# Altium PCB ParallelJoysticks.PcbDoc
Units mm, origin at the board's own origin, x right, y up, seen from the top; angles counter-clockwise.
Board outline 30.3 x 62.5 mm, 4 copper layers (Top Layer, Ground, Signal Middle, Bottom Layer), stack 1.741 mm thick; 10 components, 29 nets, 107 pads, 42 vias.
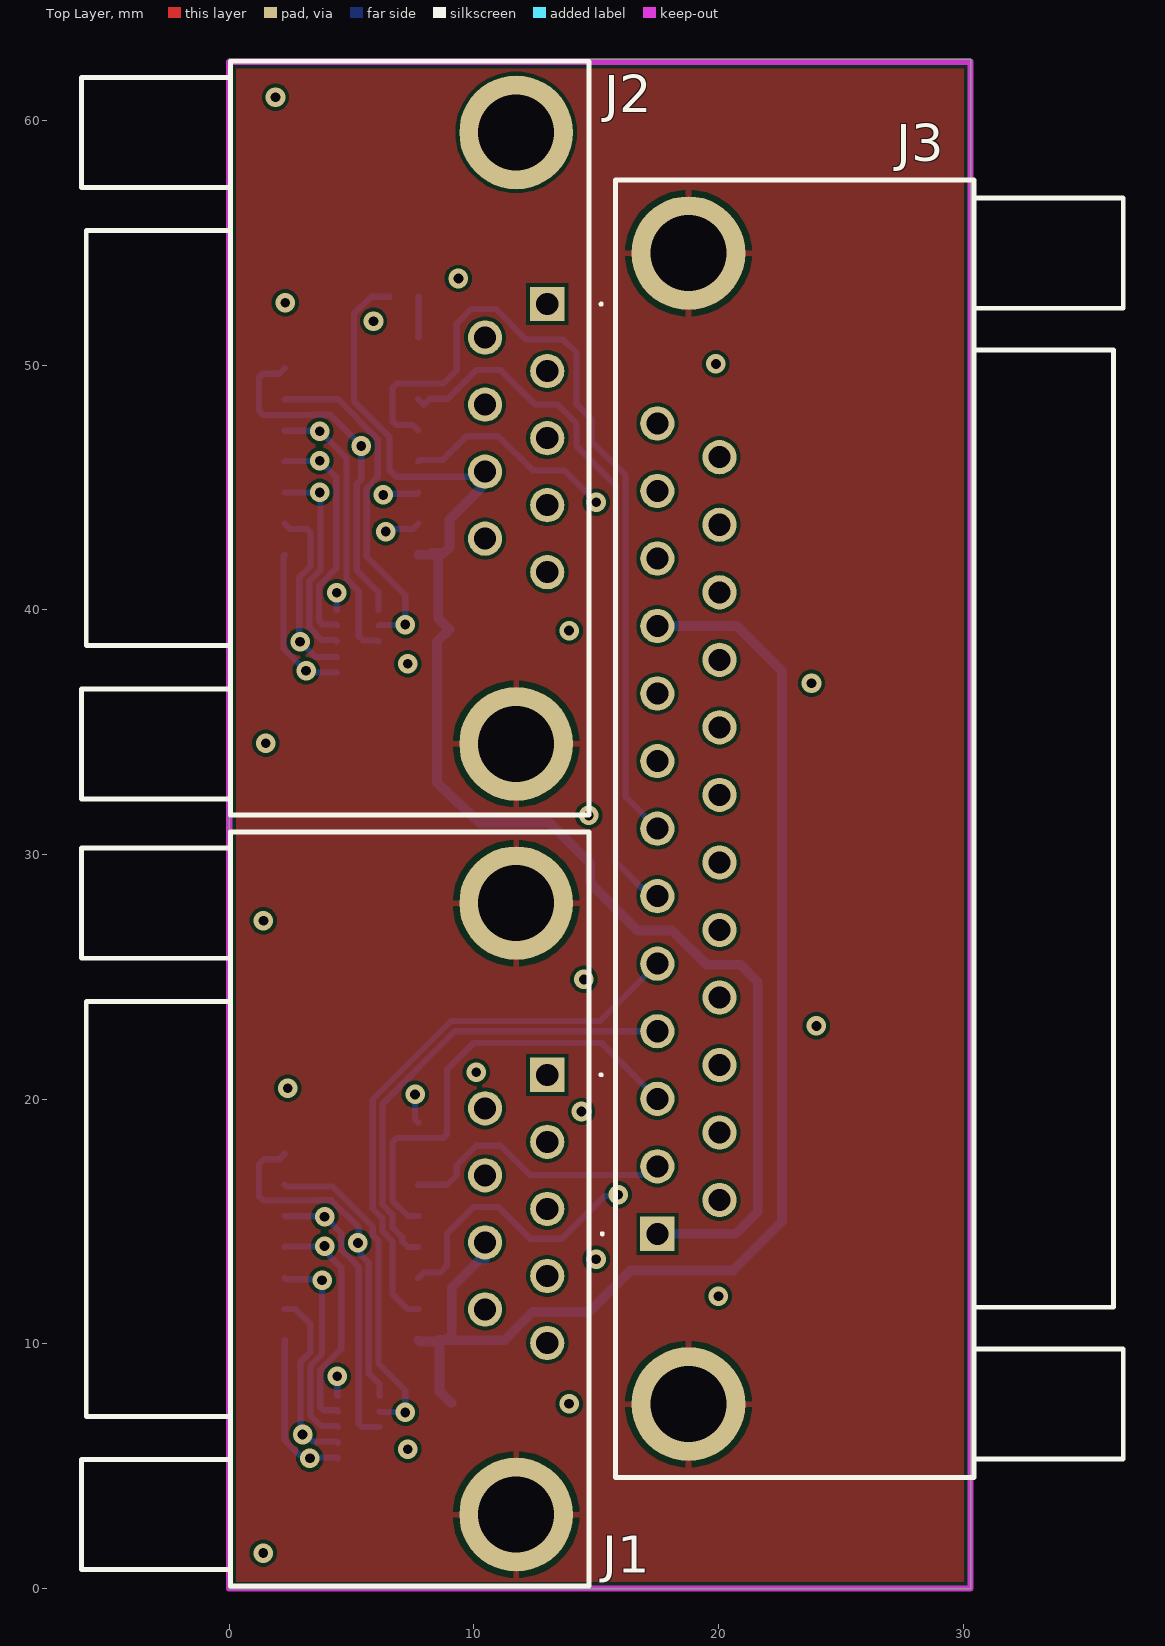
[diagram p0: Top Layer view]
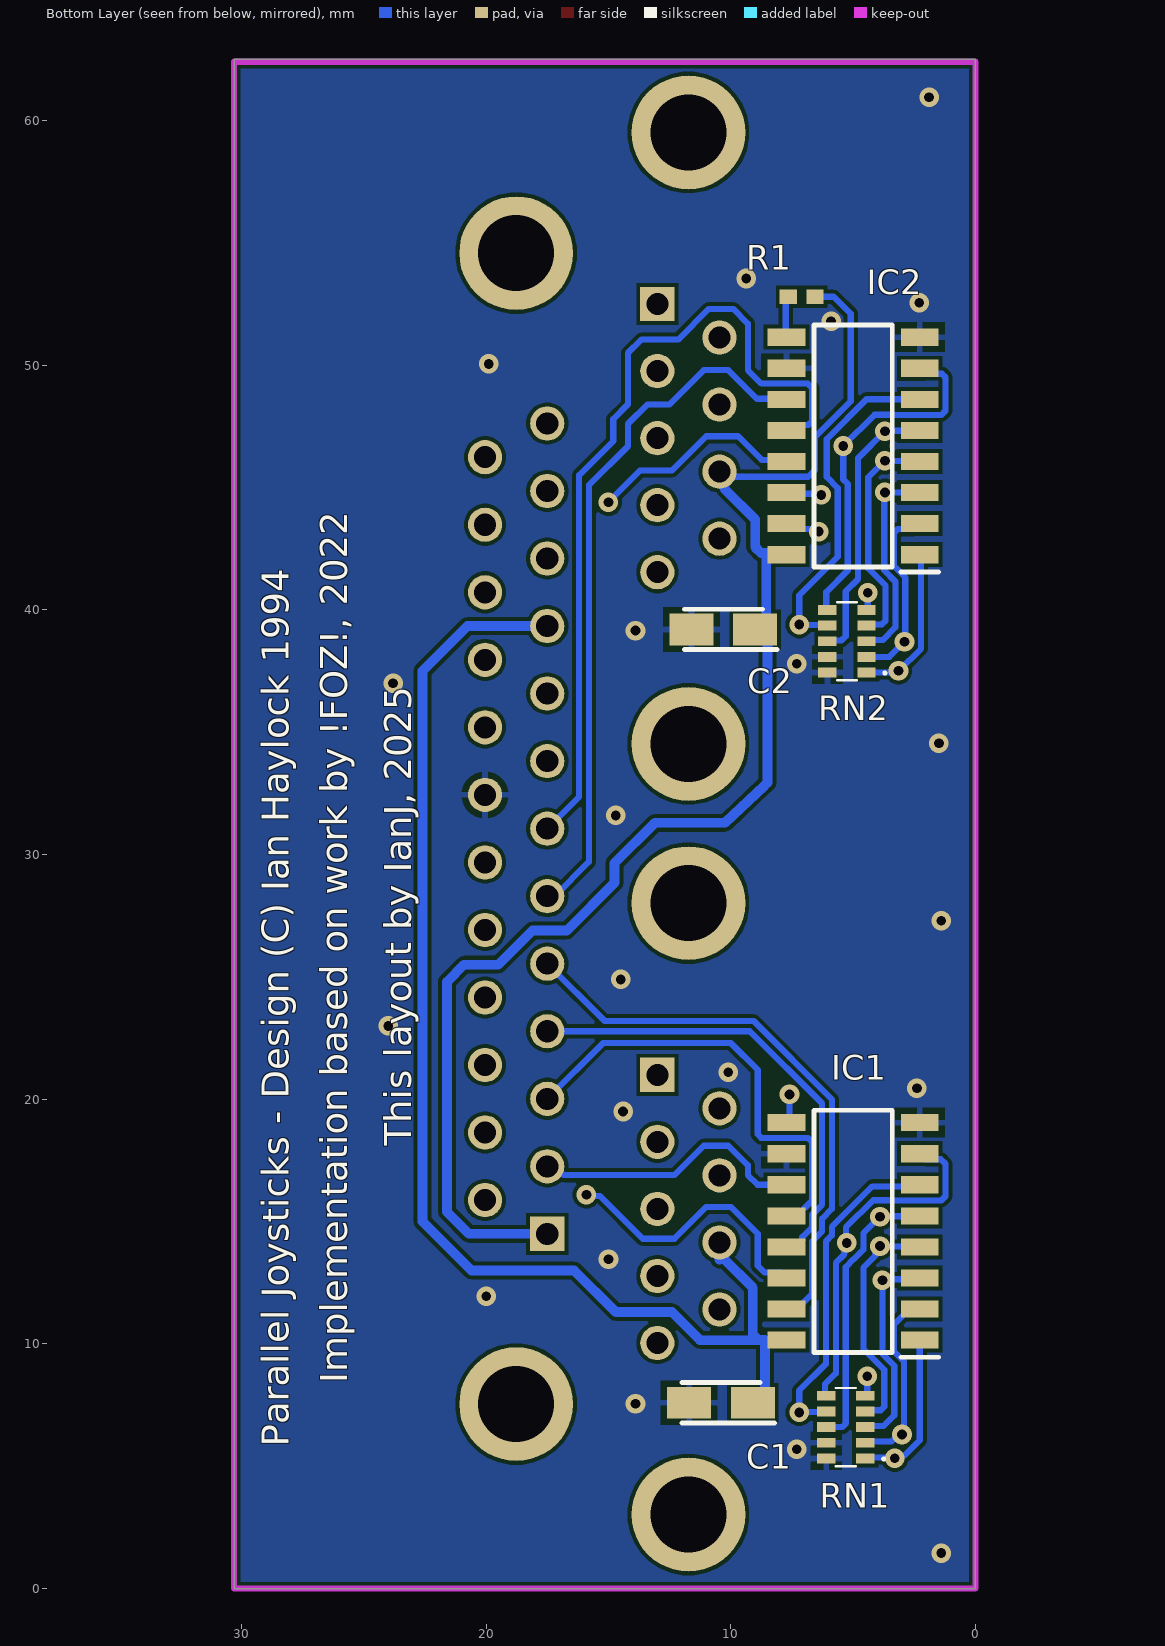
[diagram p1: Bottom Layer view, seen from below]
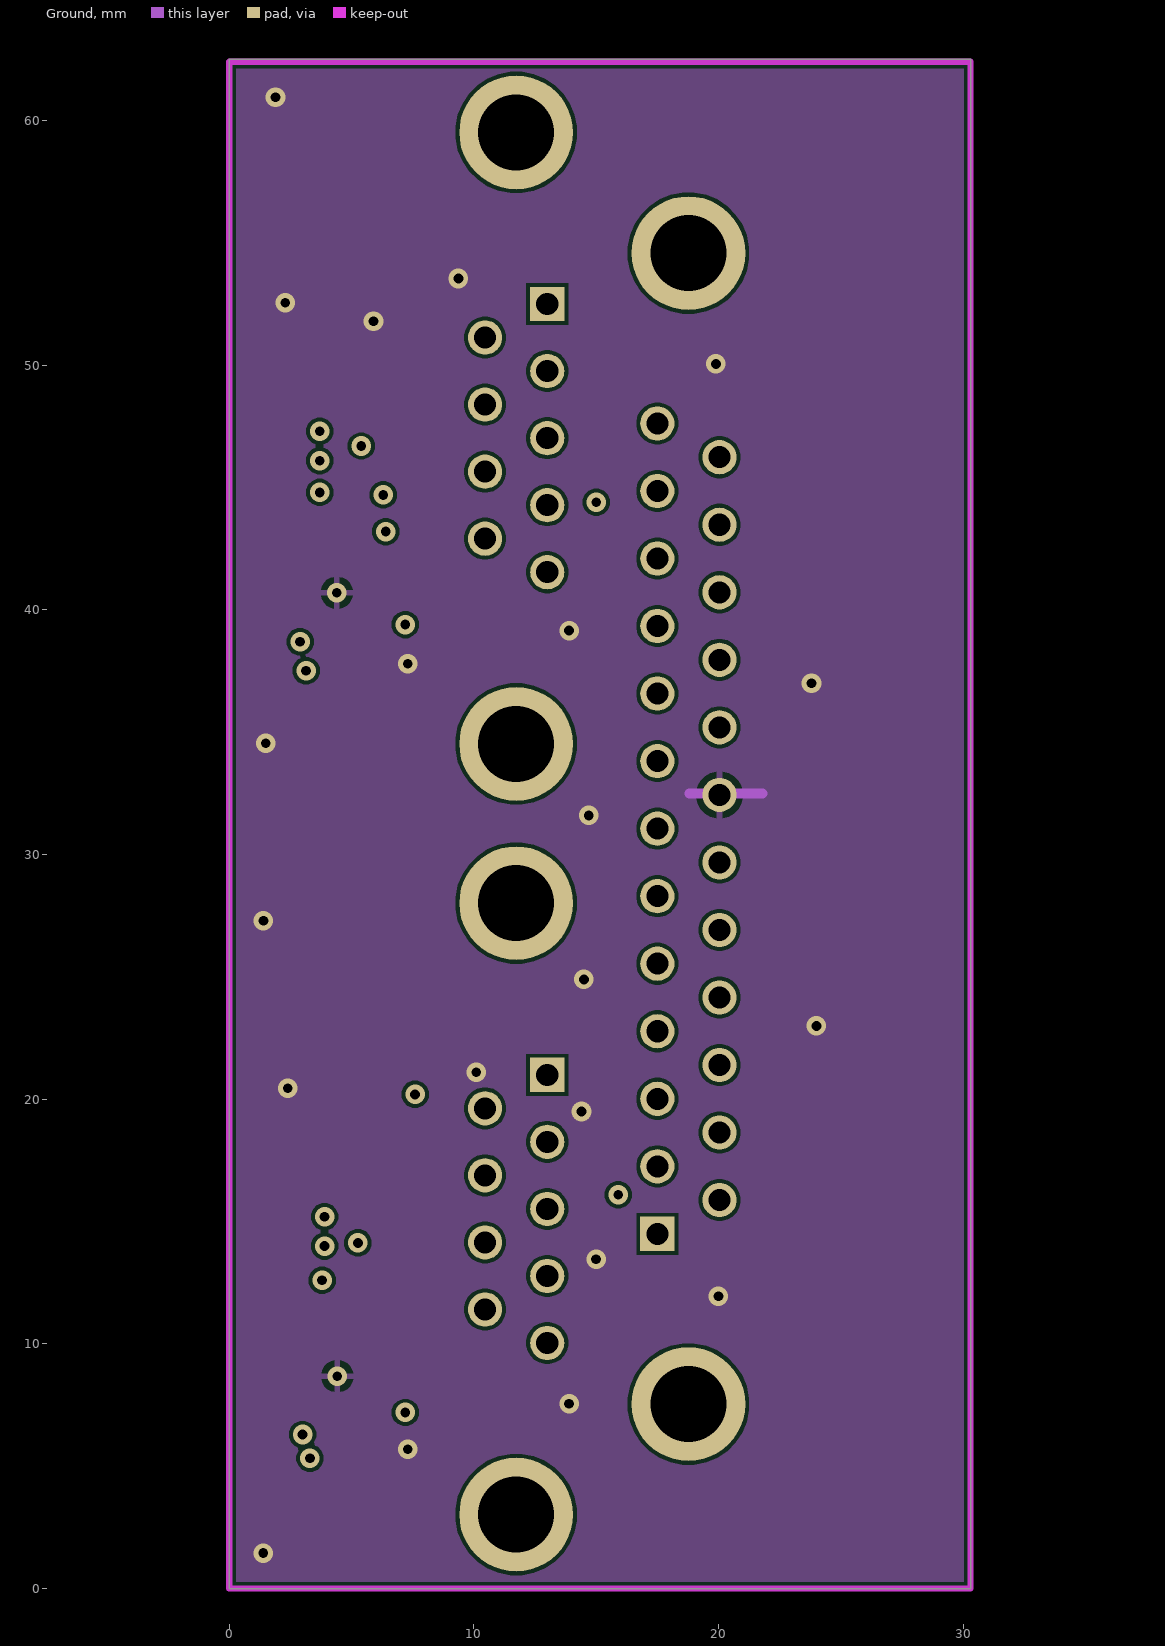
[diagram p2: Ground]
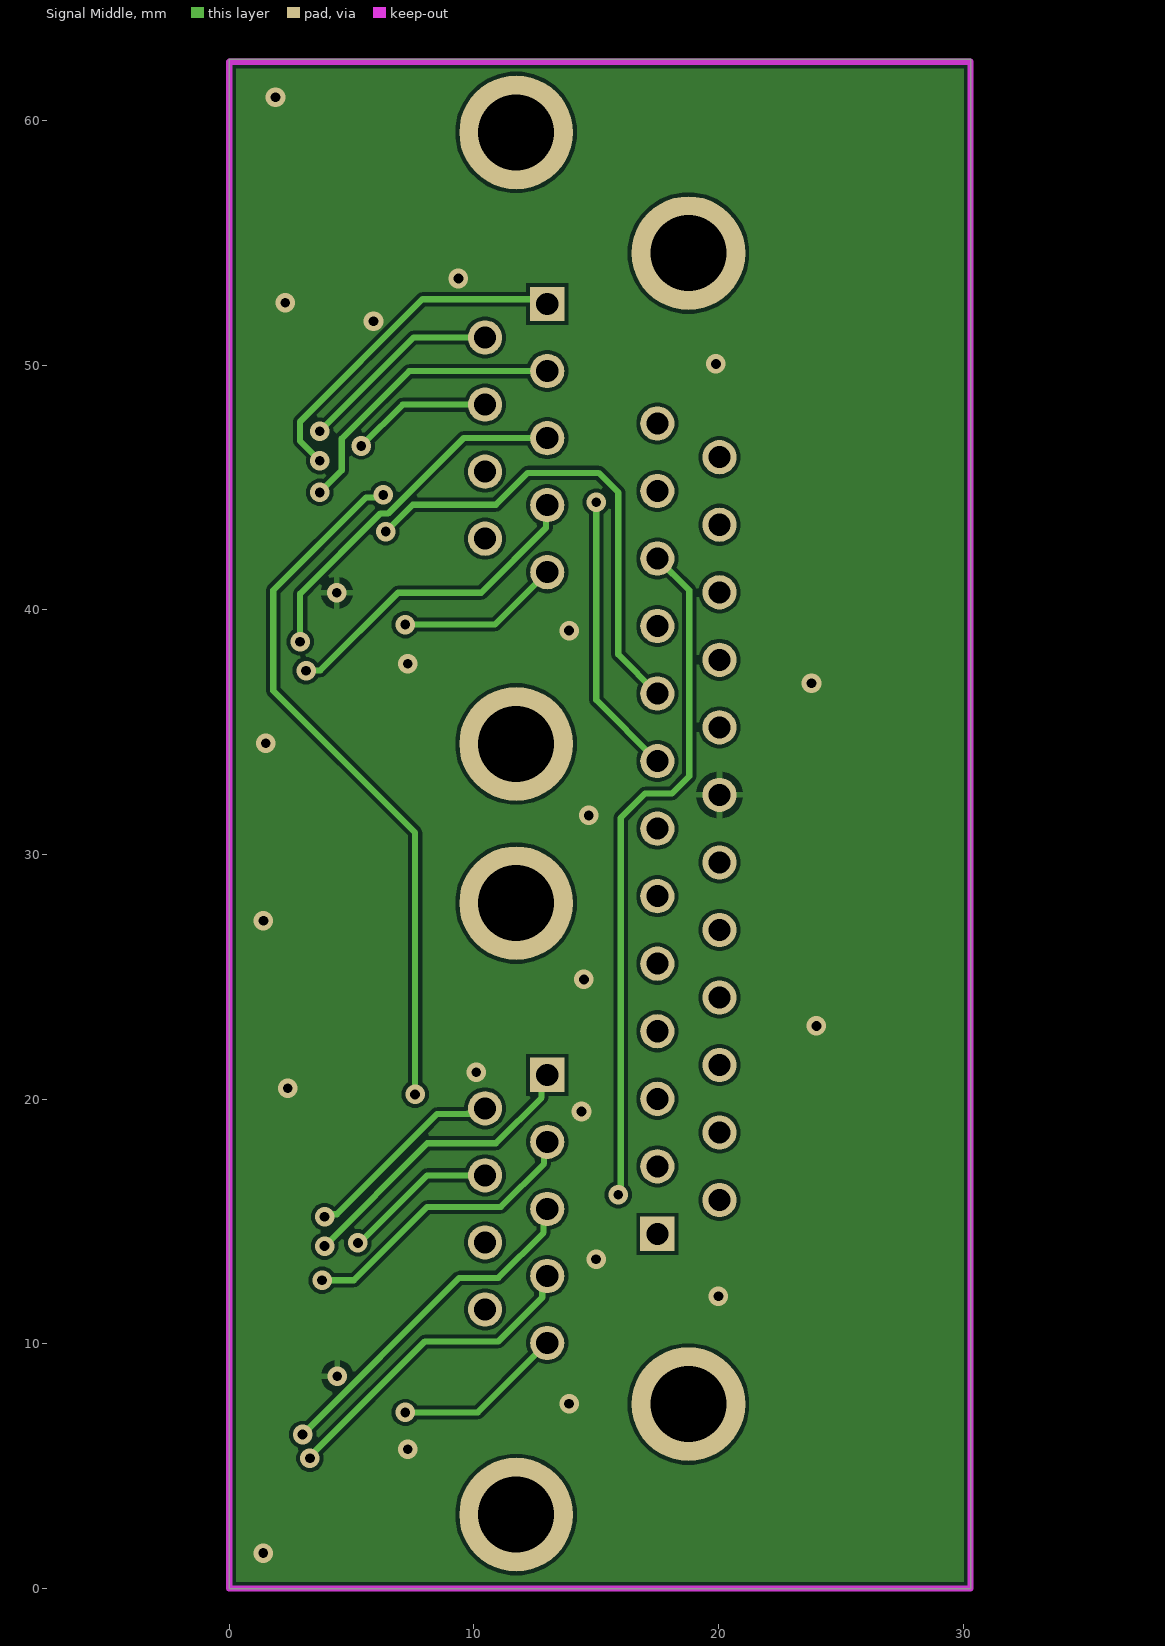
[diagram p3: Signal Middle]
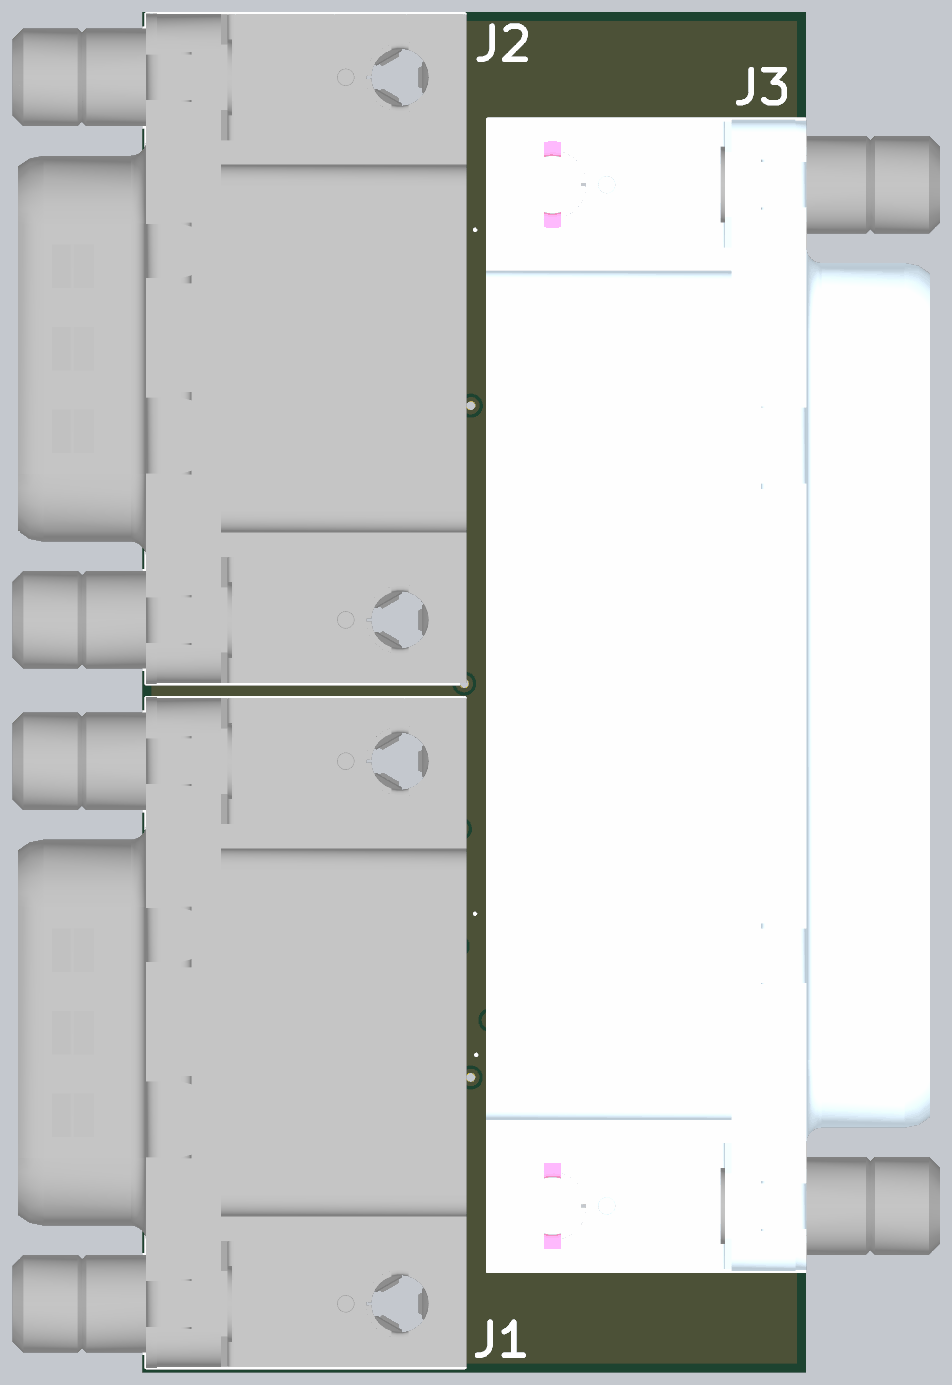
[diagram p4: 3D render of the assembled board from above, using the file's embedded part models]
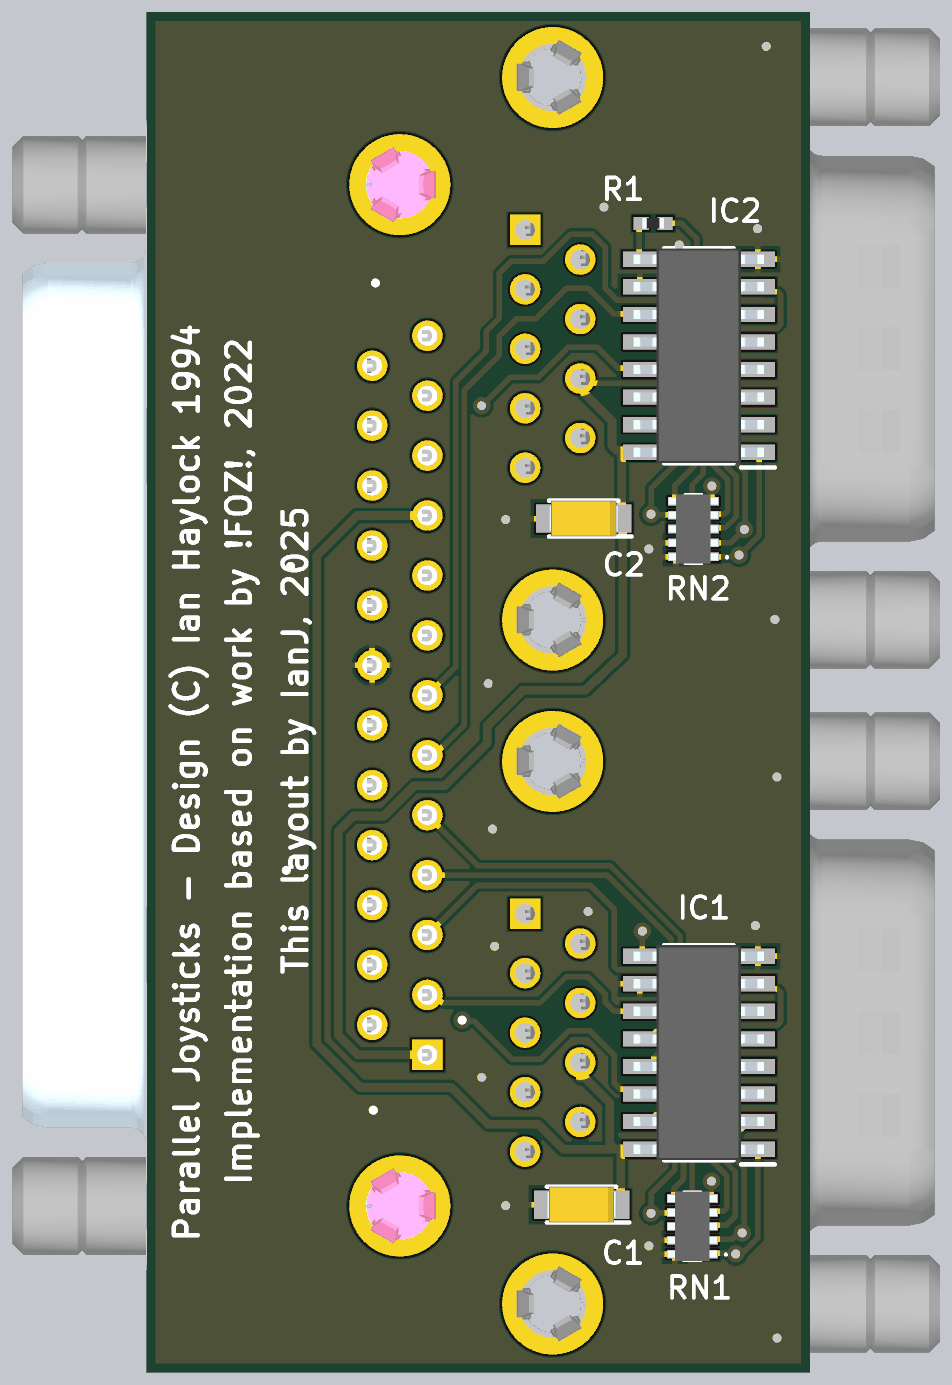
[diagram p5: 3D render of the assembled board from below, using the file's embedded part models]

## Layer stack, top to bottom
Top Solder: solder mask 0.0102, Solder Resist, Dk 3.5
Top Layer: signal copper 0.0356
Dielectric 1: dielectric 0.2, FR-4, Dk 4.8
Ground: signal copper 0.035
Dielectric 2: core 1.2, PP-006, Dk 4.1
Signal Middle: signal copper 0.035
Dielectric2: dielectric 0.2, FR-4, Dk 4.8
Bottom Layer: signal copper 0.0356
Bottom Solder: solder mask 0.0102, Solder Resist, Dk 3.5

## Board outline
0,0 0,62.5 30.3,62.5 30.3,0

## Design rules (kind name [scope] priority, off if disabled: settings)
Clearance [All] p1: gap=0.15 ignorepadtopadclearanceinfootprint=FALSE
HoleSize [All] p1: absolutevalues=TRUE maxlimit=5 minlimit=0.025 maxpercent=80.000 minpercent=20.000
MinimumSolderMaskSliver [All] p1: minsoldermaskwidth=0.05
PolygonConnect [All] p1: connectstyle=Relief reliefconductorwidth=0.254 reliefentries=4 polygonreliefangle="90 Angle" airgapwidth=0.254
RoutingVias [All] p1: holewidth=0.711 width=1.27 viastyle="Through Hole" minholewidth=0.711 minwidth=1.27 maxholewidth=0.711 maxwidth=1.27
SilkToSolderMaskClearance [IsPad] p1 off: minsilkscreentomaskgap=0.254 clearancetoexposedcopper=TRUE
SolderMaskExpansion [All] p1: expansion=0.102 istentingtop=FALSE
SupplyNets "Schematic Supply Nets_4" [InNet('VCCB')] p1: voltage=0.000
SupplyNets "Schematic Supply Nets_3" [InNet('VCCA')] p2: voltage=0.000
SupplyNets "Schematic Supply Nets_2" [InNet('SHLD')] p3: voltage=0.000
SupplyNets "Schematic Supply Nets" [InNet('GND')] p4: voltage=0.000
Width [All] p1: maxlimit=0.5 minlimit=0.254 preferedwidth=0.254 minimp=50.000000 maximp=50.000000 favimp=50.000000
27 further rules are at their usual default settings.

## Components (designator, comment, footprint, x,y, rotation, side; value= is the part's Value field where it differs from the comment)
C1 "10uF_1206" CAPPM3216X180N 10.4,7.6 r0 bottom
C2 "10uF_1206" CAPPM3216X180N 10.3,39.2 r0 bottom
IC1 "MC14512BDR2G" SOIC127P600X175-16N 5,14.6 r0 bottom locked
IC2 "MC14512BDR2G" SOIC127P600X175-16N 5,46.7 r0 bottom locked
J1 "D09P13A4GL00LF" D09P13A4GV00LF 13,21 r270 top locked
J2 "D09P13A4GL00LF" D09P13A4GV00LF 13,52.5 r270 top locked
J3 "D25P13A4GL00LF" D25P13A4GV00LF 17.5,14.5 r90 top locked
R1 "100K_0402" RESC1005X40N 7.1,52.8 r180 bottom
RN1 "YC158TJR-07100KL" YC158TJR07100KL 5.3,6.6 r0 bottom locked
RN2 "YC158TJR-07100KL" YC158TJR07100KL 5.25,38.72 r0 bottom locked

## Footprints (in the part's own frame and the unit in brackets; to place one, negate y for a bottom-side part, rotate by r counter-clockwise, add the part's x,y. Pads: shape width x height; smd on the part's side, far side on the other; paste and mask are expansions set on the pad)
CAPPM3216X180N [mm]
  rect 1.8x1.3 smd: 1(-1.3,0) 2(1.3,0)
  silkscreen extent -2.2,-0.82 1.6,0.82, body extent -1.6,-0.82 1.6,0.82, height 1.8
D09P13A4GV00LF [mm]
  rect 1.4x1.4 hole 0.9: 1(0,0)
  round 1.4 hole 0.9: 2(2.74,0) 3(5.48,0) 4(8.22,0) 5(10.96,0) 6(1.37,-2.54) 7(4.11,-2.54) 8(6.85,-2.54) 9(9.59,-2.54)
  round 4.65 hole 3.1: 10(-7.015,-1.27) 11(17.975,-1.27)
  silkscreen extent -9.92,-19.04 20.89,2.25, body extent -9.98,-19.11 20.93,1.79, height 13.43
D25P13A4GV00LF [mm]
  rect 1.4x1.4 hole 0.9: 1(0,0)
  round 1.4 hole 0.9: 2(2.76,0) 3(5.52,0) 4(8.28,0) 5(11.04,0) 6(13.8,0) 7(16.56,0) 8(19.32,0) 9(22.08,0) 10(24.84,0) 11(27.6,0) 12(30.36,0) 13(33.12,0) 14(1.38,-2.54) 15(4.14,-2.54) 16(6.9,-2.54) 17(9.66,-2.54) 18(12.42,-2.54) 19(15.18,-2.54) 20(17.94,-2.54) 21(20.7,-2.54) 22(23.46,-2.54) 23(26.22,-2.54) 24(28.98,-2.54) 25(31.74,-2.54)
  round 4.65 hole 3.1: 26(-6.96,-1.27) 27(40.08,-1.27)
  silkscreen extent -9.95,-19.04 43.07,2.3, body extent -9.96,-19.11 43.08,1.79, height 13.32
RESC1005X40N [mm]
  rect 0.7x0.6 smd: 1(-0.55,0) 2(0.55,0)
  body extent -0.5,-0.25 0.5,0.25, height 0.4
SOIC127P600X175-16N [mm]
  rect 1.55x0.7 smd: 1(-2.725,4.445) 2(-2.725,3.175) 3(-2.725,1.905) 4(-2.725,0.635) 5(-2.725,-0.635) 6(-2.725,-1.905) 7(-2.725,-3.175) 8(-2.725,-4.445) 9(2.725,-4.445) 10(2.725,-3.175) 11(2.725,-1.905) 12(2.725,-0.635) 13(2.725,0.635) 14(2.725,1.905) 15(2.725,3.175) 16(2.725,4.445)
  silkscreen extent -3.5,-4.95 1.6,5.15, body extent -3,-4.95 3,4.95, height 1.75
YC158TJR07100KL [mm]
  rect 0.75x0.4 smd: 1(-0.8,1.28) 2(-0.8,0.64) 3(-0.8,0) 4(-0.8,-0.64) 5(-0.8,-1.28) 6(0.8,1.28) 7(0.8,0.64) 8(0.8,0) 9(0.8,-0.64) 10(0.8,-1.28)
  silkscreen extent -1.6,-1.6 0.4,1.6, body extent -1.13,-1.6 1.13,1.6, height 0.8

## Part data
C1 C2: library part TAJA106M010RNJ, "Capacitor Polarised", Manufacturer_Name="Kyocera AVX", Mouser Part Number=581-TAJA106M010R, Arrow Part Number=TAJA106M010RNJ, Arrow Price/Stock=https://www.arrow.com/en/products/taja106m010rnj/avx?utm_currency=USD&region=nac, Datasheet Link=http://www.farnell.com/datasheets/1680476.pdf, Height=1.8mm, Manufacturer_Part_Number=TAJA106M010RNJ, Mouser Price/Stock=https://www.mouser.co.uk/ProductDetail/KYOCERA-AVX/TAJA106M010RNJ?qs=OVpPYgiJXXXkHCh9%252BEALWw%3D%3D
IC1 IC2: "Integrated Circuit", Manufacturer_Name=onsemi, Mouser Part Number=863-MC14512BDR2G, Arrow Part Number=MC14512BDR2G, Arrow Price/Stock=https://www.arrow.com/en/products/mc14512bdr2g/on-semiconductor, Datasheet Link=https://www.onsemi.com/pub/Collateral/MC14512B-D.PDF, Height=1.75mm, Manufacturer_Part_Number=MC14512BDR2G, Mouser Price/Stock=https://www.mouser.co.uk/ProductDetail/onsemi/MC14512BDR2G?qs=g2rIOKKlpoaxQ58M9hSKIg%3D%3D
J1 J2: library part D09P13A4GV00LF, "Connector", Manufacturer_Name="Amphenol Communications Solutions", Datasheet Link=https://cdn.amphenol-cs.com/media/wysiwyg/files/drawing/c01-8646-0742.pdf, Height=13.86mm, Manufacturer_Part_Number=D09P13A4GL00LF
J3: library part D25P13A4GV00LF, "Connector", Manufacturer_Name="Amphenol Communications Solutions", Datasheet Link=https://cdn.amphenol-cs.com/media/wysiwyg/files/drawing/c01-8646-0742.pdf, Height=13.86mm, Manufacturer_Part_Number=D25P13A4GL00LF
R1: library part CRCW0402100KFKEDHP, "Resistor", Manufacturer_Name=Vishay, Mouser Part Number=71-CRCW0402100KFKEDH, Arrow Part Number=CRCW0402100KFKEDHP, Arrow Price/Stock=https://www.arrow.com/en/products/crcw0402100kfkedhp/vishay?utm_currency=USD&region=nac, Datasheet Link=http://www.vishay.com/docs/20035/dcrcwe3.pdf, Height=0.4mm, Manufacturer_Part_Number=CRCW0402100KFKEDHP, Mouser Price/Stock=https://www.mouser.co.uk/ProductDetail/Vishay-Dale/CRCW0402100KFKEDHP?qs=k2%2FDWSARqgGFakjlJe4Ejw%3D%3D
RN1 RN2: "Resistor Network", Manufacturer_Name=KEMET, Mouser Part Number=603-YC158TJR-07100KL, Arrow Part Number=YC158TJR-07100KL, Arrow Price/Stock=https://www.arrow.com/en/products/yc158tjr-07100kl/yageo?region=nac, Datasheet Link=https://media.digikey.com/pdf/Data%20Sheets/Yageo%20PDFs/YC102-358,TC122-164_Series_DS.pdf, Height=0.7mm, Manufacturer_Part_Number=YC158TJR-07100KL, Mouser Price/Stock=https://www.mouser.com/Search/Refine.aspx?Keyword=603-YC158TJR-07100KL

## Via types
v1: diameter 0.8, hole 0.4, Top Layer to Bottom Layer, tented both sides, 42 vias

## Nets (pads, with @x,y where several pads share a name; then routed paths per layer and width w, separated by ;. In a path a pad name is that pad's centre, name@x,y a point inside that pad or via, vN(x,y) a via of type N, cw(c..) or ccw(c..) an arc to the next point about the centre after c; other vN are vias at no path point)
A_1: IC1.11 J3.2 | length 11.3
  Bottom Layer w0.254: IC1.11 8.905,16.505 9.3,16.9 9.3,17.3 10.1,18.1 11.1,18.1 12.3,16.9 16.83,16.9 17.19,17.26 J3.2
A_2: IC2.11 J3.6 | length 28.9
  Bottom Layer w0.254: IC2.11 7.948,48.382 8.198,48.632 8.932,48.632 10.1,49.8 11.1,49.8 12.5,48.4 13.4,48.4 14.2,47.6 14.2,46.696 15.796,45.1 15.796,29.704 17.2,28.3 J3.6
B_1: IC1.12 J3.3 | length 18.7
  Bottom Layer w0.254: IC1.12 7.3,15.235 6.673,15.862 6.673,18.24 6.851,18.418 8.751,18.418 8.9,18.567 8.9,21.2 10,22.3 15.22,22.3 J3.3
B_2: IC2.12 J3.7 | length 34.1
  Bottom Layer w0.254: IC2.12 7.502,47.558 6.822,47.558 6.673,47.707 6.673,49.07 6.851,49.248 8.748,49.248 9.3,49.8 9.3,51.7 9.9,52.3 10.9,52.3 12.15,51.05 13.651,51.05 14.2,50.501 14.2,48.4 14.8,47.8 14.8,46.9 16.2,45.5 16.2,32.36 J3.7
C_1: IC1.13 J3.4 | length 19.2
  Bottom Layer w0.254: IC1.13 7.3,13.965 7.077,14.188 7.077,14.366 6.673,14.77 6.673,15.291 6.269,15.695 6.269,19.826 9.223,22.78 J3.4
C_2: IC2.13 J3.8 | length 20.4
  Signal Middle w0.254: v1(15,44.4) 15,36.32 J3.8
  Bottom Layer w0.254: IC2.13 7.792,46.132 8.732,46.132 9.7,47.1 11,47.1 12.4,45.7 13.7,45.7 v1(15,44.4)
DIS_1: IC1.15 J3.5 | length 23.5
  Bottom Layer w0.254: IC1.15 7.3,11.425 6.673,12.052 6.673,14.199 6.269,14.603 6.269,15.123 5.865,15.527 5.865,19.994 9.071,23.2 15.16,23.2 J3.5
DIS_2: IC2.15 J3.9 | length 21.2
  Signal Middle w0.254: v1(6.4,43.2) 7.5,44.3 10.9,44.3 12.2,45.6 15.1,45.6 15.9,44.8 15.9,38.18 J3.9
  Bottom Layer w0.254: v1(6.4,43.2) 6.504,43.304 7.504,43.304 IC2.15
GND: C1.2 C2.2 IC1.8 IC1.10 IC2.8 IC2.10 J3.20 RN1.5 RN1.6 RN1.7 RN2.5 RN2.6 RN2.7 | length 4.5
  Ground w0.4: 18.8,32.5 21.8,32.5
  Bottom Layer w0.254: RN2.5@4.4,40 v1(4.4,40.7) ; v1(4.418,8.682) 4.418,7.912 RN1.5@4.45,7.88
  other v1: 1.394,1.453 7.3,5.7 13.894,7.553 19.994,11.953 14.997,13.459 14.4,19.5 2.394,20.453 10.1,21.1 24,23 14.5,24.9 1.4,27.3 14.7,31.6 1.494,34.553 23.8,37 7.3,37.8 13.894,39.153 19.894,50.053 5.9,51.8 2.294,52.553 9.368,53.543 1.894,60.953
NetIC2_9: IC2.9 R1.1 | length 1.7
  Bottom Layer w0.254: IC2.9 7.75,51.17 R1.1@7.75,52.8
SHLD: J1.10 J1.11 J2.11 J3.26 J3.27
VCCA: C1.1 IC1.16 J1.8 J3.10 | length 53.2
  Bottom Layer w0.4: IC1.16 7.78,10.1 8.6,10.1 8.6,8.05 9.05,7.6 C1.1 ; 8.6,10.176 8.866,10.176 ; 10.269,13.469 9.1,12.3 9.1,10.389 8.866,10.155 11.255,10.155 12.4,11.3 14.7,11.3 16.4,13 20.6,13 22.6,15 22.6,37.5 20.76,39.34 J3.10 ; J1.8@10.269,13.64 10.269,13.959 J1.8 10.46,13.959 10.46,13.64 10.46,13.44
VCCB: C2.1 IC2.16 J2.8 J3.1 R1.2 | length 58.4
  Bottom Layer w0.254: R1.2 5.8,52.8 5.1,52.1 5.1,48.529 6.552,47.077 6.552,45.721 6.835,45.438 J2.8@10.248,45.438
  Bottom Layer w0.4: IC2.16 IC2.16@8.3,42.255 ; IC2.16@8.3,42.327 8.766,42.327 9,42.561 9,43.7 10.269,44.969 10.269,45.459 J2.8 J2.8@10.248,45.438 ; 8.545,42.255 8.545,39.65 8.995,39.2 C2.1 8.5,38.7 8.5,32.939 8.621,32.818 10.23,31.3 12.3,31.3 13.1,31.3 14.75,29.65 14.75,28.85 16.7,26.9 18.1,26.9 19.5,25.5 20.9,25.5 21.6,24.8 21.6,15.4 20.7,14.5 J3.1
X0_1: IC1.1 J1.4 RN1.1 | length 19.8
  Signal Middle w0.254: v1(3.3,5.331) 3.3,5.4 8,10.1 11,10.1 12.799,11.899 12.799,12.579 J1.4
  Bottom Layer w0.254: IC1.1 2.275,6.068 2.907,5.435 3.196,5.435 v1(3.3,5.331) ; v1@3.34,5.36 4.41,5.36 RN1.1@4.45,5.32
X0_2: IC2.1 J2.4 RN2.1 | length 19.6
  Signal Middle w0.254: v1(3.144,37.517) 3.157,37.529 3.729,37.529 6.9,40.7 10.3,40.7 12.948,43.348 12.948,44.228 J2.4
  Bottom Layer w0.254: IC2.1 2.223,42.203 2.223,38.42 3.126,37.517 v1(3.144,37.517) ; v1@3.2,37.6 3.348,37.6 3.508,37.44 RN2.1@4.4,37.44
X1_1: IC1.2 J1.3 RN1.2 | length 21.9
  Signal Middle w0.254: v1(3,6.3) 9.4,12.7 11,12.7 12.85,14.55 12.85,15.37 J1.3
  Bottom Layer w0.254: IC1.2 2.7,11.425 3.327,10.798 3.327,9.69 2.915,9.278 2.915,6.385 v1(3,6.3) 3.148,6.3 3.44,6.008 4.402,6.008 RN1.2@4.45,5.96
X1_2: IC2.2 J2.3 RN2.2 | length 22.3
  Signal Middle w0.254: v1(2.9,38.7) 2.9,40.657 6.183,43.94 6.498,43.94 9.577,47.02 J2.3
  Bottom Layer w0.254: IC2.2 2.498,43.302 3.178,43.302 3.327,43.153 3.327,41.79 2.865,41.328 2.865,38.735 3.52,38.08 RN2.2@4.4,38.08
X2_1: IC1.3 J1.2 RN1.3 | length 20.6
  Signal Middle w0.254: v1(3.8,12.6) 5.1,12.6 8.1,15.6 11.1,15.6 12.87,17.37 12.87,18.13 J1.2
  Bottom Layer w0.254: IC1.3 2.322,12.648 3.752,12.648 v1(3.8,12.6) 3.8,9.592 3.319,9.111 3.319,7.081 3.752,6.648 4.402,6.648 RN1.3@4.45,6.6
X2_2: IC2.3 J2.2 RN2.3 | length 20.6
  Signal Middle w0.254: v1(3.7,44.8) 4.6,45.7 4.6,47 7.36,49.76 J2.2
  Bottom Layer w0.254: IC2.3 2.277,44.797 3.698,44.797 v1(3.7,44.8) 3.731,44.769 3.731,41.623 3.269,41.161 3.269,39.288 3.789,38.768 4.352,38.768 RN2.3@4.4,38.72
X3_1: IC1.4 J1.1 RN1.4 | length 22
  Signal Middle w0.254: v1(3.9,14) 8.1,18.2 10.9,18.2 12.768,20.068 12.768,20.768 J1.1
  Bottom Layer w0.254: IC1.4 2.292,13.982 3.882,13.982 v1(3.9,14) ; v1@3.889,13.982 3.889,13.864 4.098,13.654 4.098,13.602 4.577,13.123 4.577,9.798 3.723,8.944 3.723,7.437 3.872,7.288 4.402,7.288 RN1.4@4.45,7.24
X3_2: IC2.4 J2.1 RN2.4 | length 23.5
  Signal Middle w0.254: v1(3.7,46.1) 2.9,46.9 2.9,47.7 7.9,52.7 12.8,52.7 J2.1
  Bottom Layer w0.254: IC2.4 2.292,46.082 3.682,46.082 v1(3.7,46.1) 4.377,45.423 4.377,41.698 3.673,40.994 3.673,39.557 3.822,39.408 4.352,39.408 RN2.4@4.4,39.36
X4_1: IC1.5 J1.6 RN1.8 | length 20
  Signal Middle w0.254: v1(3.9,15.2) 4.004,15.304 4.404,15.304 8.5,19.4 9.738,19.4 9.749,19.411 10.241,19.411 J1.6
  Bottom Layer w0.254: IC1.5 2.292,15.218 3.882,15.218 4.577,14.523 4.577,13.866 4.584,13.858 4.584,13.849 4.981,13.453 4.99,13.453 5.3,13.143 5.3,6.749 5.449,6.6 RN1.8@6.15,6.6
X4_2: IC2.5 J2.6 RN2.8 | length 19.7
  Signal Middle w0.254: v1(3.7,47.3) 7.53,51.13 J2.6
  Bottom Layer w0.254: IC2.5 2.292,47.317 3.682,47.317 4.8,46.2 4.8,41.257 5.3,40.757 5.3,39.7 5.3,38.926 5.474,38.752 6.068,38.752 RN2.8@6.1,38.72
X5_1: IC1.6 J1.5 RN1.9 | length 20.5
  Signal Middle w0.254: v1(7.2,7.2) 10.16,7.2 J1.5
  Bottom Layer w0.254: IC1.6 2.34,16.44 4.21,16.44 5.865,14.785 5.865,14.436 6.108,14.193 6.108,9.192 7.2,8.1 v1(7.2,7.2) 7.18,7.22 6.17,7.22 RN1.9@6.15,7.24
X5_2: IC2.6 J2.5 RN2.9 | length 20.7
  Signal Middle w0.254: v1(7.2,39.4) 10.86,39.4 J2.5
  Bottom Layer w0.254: IC2.6 4.452,48.605 6.077,46.98 6.077,45.434 5.623,44.98 5.623,42.177 7.2,40.6 v1(7.2,39.4) 7.18,39.38 6.12,39.38 RN2.9@6.1,39.36
X6_1: IC1.7 J1.7 RN1.10 | length 20.7
  Signal Middle w0.254: v1(5.261,14.13) 5.33,14.13 8.09,16.89 J1.7
  Bottom Layer w0.254: IC1.7 2.052,17.552 1.417,17.552 1.223,17.358 1.223,16.04 1.401,15.862 3.538,15.862 3.553,15.877 4.18,15.877 5.296,14.762 5.296,14.304 v1@5.366,14.234 ; v1(5.261,14.13) 5.366,14.13 5.366,13.708 5.371,13.703 5.371,13.643 5.704,13.31 5.704,8.796 6.15,8.35 RN1.10@6.15,7.88
X6_2: IC2.7 J2.7 RN2.10 | length 20.3
  Signal Middle w0.254: v1(5.4,46.7) 7.09,48.39 J2.7
  Bottom Layer w0.254: IC2.7 2.052,49.652 1.372,49.652 1.223,49.503 1.223,48.14 1.401,47.962 3.367,47.962 3.382,47.977 4.123,47.977 v1(5.4,46.7) 5.4,45.329 5.219,45.148 5.219,41.61 6.1,40.729 RN2.10@6.1,40
X7_2: IC1.9 IC2.14 | length 31.8
  Signal Middle w0.254: v1(6.3,44.7) 6.196,44.596 5.596,44.596 1.8,40.8 1.8,36.7 7.6,30.9 v1(7.6,20.2)
  Bottom Layer w0.254: v1(6.3,44.7) 6.348,44.748 7.678,44.748 IC2.14 ; v1(7.6,20.2) 7.6,19.17 IC1.9
Z_1: IC1.14 J3.11 | length 39.8
  Signal Middle w0.254: v1(15.9,16.1) 16,16.2 16,31.5 17,32.5 18.1,32.5 18.8,33.2 18.8,40.8 J3.11
  Bottom Layer w0.254: IC1.14 7.948,12.918 8.618,12.918 8.9,13.2 8.9,14.5 10,15.6 11,15.6 12.3,14.3 13.6,14.3 15.352,16.052 15.852,16.052 v1(15.9,16.1)
pads on no net: J1.9 J2.9 J2.10 J3.12 J3.13 J3.14 J3.15 J3.16 J3.17 J3.18 J3.19 J3.21 J3.22 J3.23 J3.24 J3.25

## Polygon pours and split planes (outlines as drawn)
SHLD on Top Layer "NONET_L-01_P-001" (solid, remove dead copper, pour order 0): 0.189,0 30.3,0 30.3,62.5 0,62.5
GND on Bottom Layer "NONET_L-01_P-001" (solid, remove dead copper, pour order 1): 0.189,0 30.3,0 30.3,62.5 0,62.5
GND on Signal Middle "GND_L03_P003" (solid, remove dead copper, pour order 3): 0,0 30.3,0 30.3,62.5 0,62.5
GND on Ground "GND_L02_P002" (solid, remove dead copper, pour order 2): 0,0 30.3,0 30.3,62.5 -0.2,62.6

## Keep-outs
Keep-Out Layer:
  lines w0.254: 0,0 30.3,0 30.3,62.4 0,62.4 0,0

## Silkscreen, mask and mechanical layers (free items; w line width, h text height)
Bottom Overlay:
  text "This layout by IanJ, 2025" at 23.067,18.1 h1.1 r270
  text "Implementation based on work by !FOZ!, 2022" at 25.667,8.4 h1.1 r270
  text "Parallel Joysticks - Design (C) Ian Haylock 1994" at 28.067,5.8 h1.1 r270
Board Shape:
  lines w0.254: 0,0 0,62.4 30.3,62.4 30.3,0 0,0